# Altium PCB Steezy60ALPS.PcbDoc (part 3 of 3)
Units mm, origin at the board's own origin, x right, y up, seen from the top; angles counter-clockwise.
Board outline 284.73 x 94.2 mm, 2 copper layers (Component Side, Bottom Layer), stack 1.571 mm thick; 204 components, 132 nets, 895 pads, 223 vias.
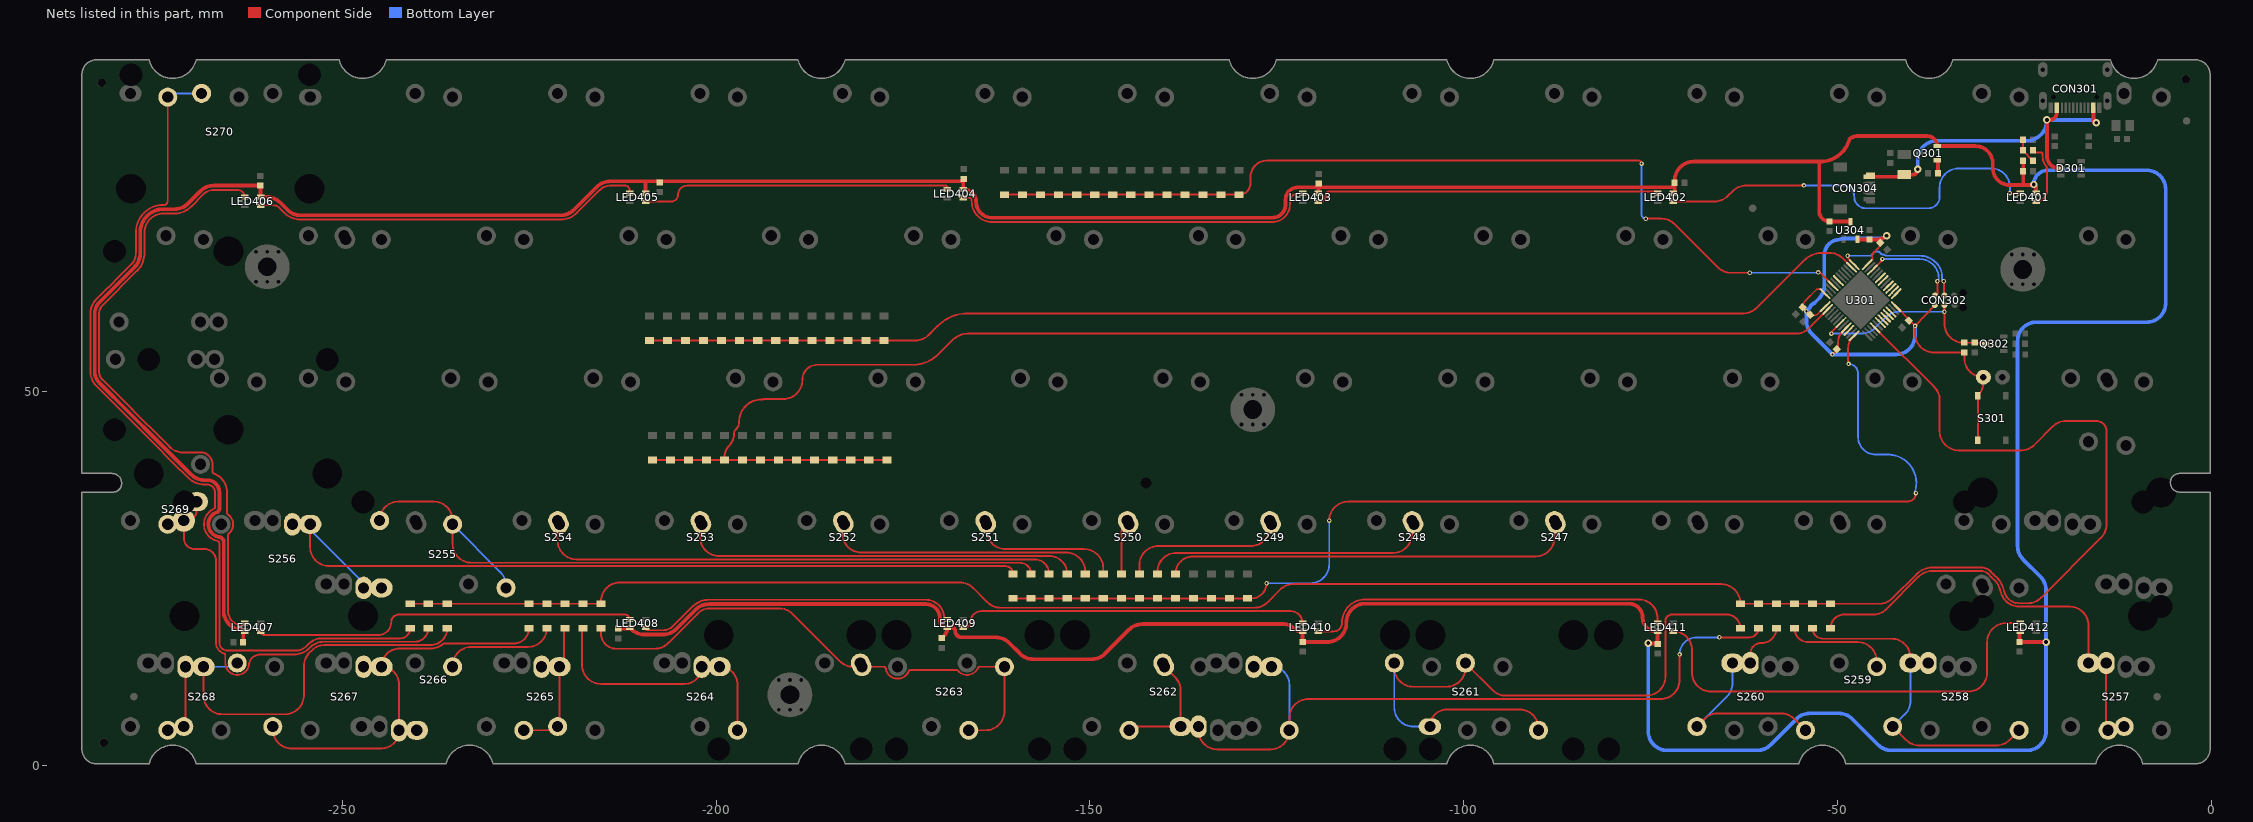
[diagram p3: the nets of this part, all layers, seen from the top]

## Via types
v1: diameter 0.6, hole 0.3, Component Side to Bottom Layer, tented both sides, 156 vias
v2: diameter 1, hole 0.5, Component Side to Bottom Layer, tented both sides, 42 vias
v3: diameter 0.6, hole 0.3, Component Side to Bottom Layer, tented bottom, 25 vias

## Nets (pads, with @x,y where several pads share a name; then routed paths per layer and width w, separated by ;. In a path a pad name is that pad's centre, name@x,y a point inside that pad or via, vN(x,y) a via of type N, cw(c..) or ccw(c..) an arc to the next point about the centre after c; other vN are vias at no path point) (continued)
NetD247_1: D247.1 S247.1 | length 55.7
  Component Side w0.254: D247.1@-138.557,25.635 cw(c-136.214,25.635) -136.214,27.978 -90.39,27.978 ccw(c-90.39,30.518) -87.85,30.518 S247.1@-87.85,32.765
NetD248_1: D248.1 S248.1 | length 39
  Component Side w0.254: D248.1@-140.97,25.635 -140.97,25.908 cw(c-138.43,25.908) -138.43,28.448 -132.207,28.448 -109.44,28.448 ccw(c-109.44,30.988) -106.9,30.988 S248.1@-106.9,32.765
NetD249_1: D249.1 S249.1 | length 22.1
  Component Side w0.254: D249.1@-143.383,25.635 -143.383,26.816 cw(c-140.843,26.816) -140.843,29.356 -128.49,29.356 ccw(c-128.49,31.896) -125.95,31.896 S249.1@-125.95,32.512
NetD250_1: D250.1 S250.1 | length 7.4
  Component Side w0.254: D250.1@-145.796,25.635 -145.796,30.917 cw(c-143.256,30.917) -145.052,32.713 S250.1@-145,32.765
NetD251_1: D251.1 S251.1 | length 20.1
  Component Side w0.254: S251.1@-163.812,32.265 -163.812,31.48 ccw(c-161.272,31.48) -161.272,28.94 -150.749,28.94 cw(c-150.749,26.4) -148.209,26.4 D251.1@-148.209,25.635
NetD252_1: D252.1 S252.1 | length 37.4
  Component Side w0.254: S252.1@-183.099,32.765 -183.099,31.026 ccw(c-180.559,31.026) -180.559,28.486 -153.162,28.486 cw(c-153.162,25.946) -150.622,25.946 D252.1@-150.622,25.635
NetD253_1: D253.1 S253.1 | length 54.1
  Component Side w0.254: S253.1@-202.15,32.765 -202.15,30.572 ccw(c-199.61,30.572) -199.61,28.032 -155.432,28.032 cw(c-155.432,25.635) D253.1@-153.035,25.635
NetD254_1: D254.1 S254.1 | length 71
  Component Side w0.254: S254.1@-221.2,32.765 -221.2,30.118 ccw(c-218.66,30.118) -218.66,27.578 -157.391,27.578 cw(c-157.391,25.635) D254.1@-155.448,25.635
NetD255_1: D255.1 S255.1 | length 107.1
  Component Side w0.254: S255.1@-245.012,32.512 S255.1@-245.012,32.765 ; S255.1@-245.012,32.765 cw(c-242.472,32.766) -242.472,35.306 -237.79,35.306 cw(c-237.79,32.766) -235.25,32.766 S255.1@-235.25,32.265 -235.25,29.664 ccw(c-232.71,29.664) -232.71,27.124 -159.35,27.124 cw(c-159.35,25.635) D255.1@-157.861,25.635
  Bottom Layer w0.254: S255.1@-235.25,32.265 -228.85,25.865 cw(c-230.646,24.069) -228.106,24.069 S255.1@-228.106,23.765
NetD256_1: D256.1 S256.1 | length 110.6
  Component Side w0.254: S256.1@-254.299,32.265 -254.299,29.21 ccw(c-251.759,29.21) -251.759,26.67 -161.309,26.67 cw(c-161.309,25.635) D256.1@-160.274,25.635
  Bottom Layer w0.254: S256.1@-254.199,32.265 -254.199,31.441 -247.055,24.297 S256.1@-247.055,23.765
NetD257_1: D257.1 S257.1 | length 57.8
  Component Side w0.254: D257.1@-50.927,18.365 cw(c-49.096,18.365) -49.096,20.196 -45.177,20.196 ccw(c-45.177,22.571) -43.499,20.89 ccw(c-45.177,22.571) -43.496,20.893 -39.098,25.291 cw(c-37.302,23.495) -37.302,26.035 -30.79,26.035 cw(c-30.79,24.638) -29.802,25.626 -29.393,25.217 -28.899,24.723 cw(c-29.078,24.543) -28.889,24.712 -28.85,24.669 cw(c-30.719,22.987) -28.428,24.024 cw(c-30.719,22.987) -28.322,23.746 -28.087,23.007 ccw(c-25.7,23.765) -27.985,22.739 ccw(c-25.7,23.765) -25.7,21.26 -18.952,21.26 cw(c-18.952,18.72) -16.412,18.72 S257.1@-16.412,13.715 ; S257.1@-17.062,13.715 S257.1@-16.738,14.04 ; S257.1@-14.681,13.715 -14.097,13.131 -14.097,5.018 S257.1@-13.794,4.715 ; S257.1@-11.557,4.208 S257.1@-11.557,5.588
NetD258_1: D258.1 S258.1 | length 44
  Component Side w0.254: D258.1@-53.34,18.365 ccw(c-51.939,18.365) -51.939,16.964 -42.764,16.964 cw(c-42.764,14.424) -40.224,14.424 S258.1@-40.224,13.715 ; S258.1@-42.606,5.215 -40.802,3.411 ccw(c-39.006,5.207) -39.006,2.667 -28.8,2.667 ccw(c-28.8,5.207) -27.004,3.411 S258.1@-25.699,4.715
  Bottom Layer w0.254: S258.1@-42.606,5.215 -40.968,6.852 ccw(c-42.764,8.648) -40.224,8.648 S258.1@-40.224,13.715
NetD259_1: D259.1 S259.1 | length 14.3
  Component Side w0.254: D259.1@-55.753,18.365 ccw(c-53.898,18.365) -53.898,16.51 -47.29,16.51 cw(c-47.29,13.97) -44.75,13.97 S259.1@-44.75,13.215
NetD260_1: D260.1 S260.1 | length 33
  Component Side w0.254: S260.1@-68.799,5.215 -67.773,6.241 cw(c-65.977,4.445) -65.977,6.985 -57.597,6.985 cw(c-57.597,4.445) -56.935,6.897 cw(c-57.597,4.445) -55.801,6.241 S260.1@-54.274,4.715 ; S260.1@-61.656,13.715 -61.656,14.925 cw(c-60.198,14.925) -60.198,16.383 -60.148,16.383 ccw(c-60.148,18.365) D260.1@-58.166,18.365
  Bottom Layer w0.254: S260.1@-68.799,5.215 -64.781,9.234 ccw(c-66.577,11.03) -64.037,11.03 S260.1@-64.037,13.715
NetD261_1: D261.1 S261.1 | length 92.3
  Component Side w0.254: S261.1@-109.281,13.715 -109.281,13.081 ccw(c-106.741,13.081) -106.741,10.541 -102.296,10.541 ccw(c-102.296,13.081) -99.756,13.081 S261.1@-99.756,13.715 -96.129,10.088 ccw(c-94.333,11.884) -94.333,9.344 -75.565,9.344 ccw(c-75.565,11.884) -73.668,10.195 ccw(c-75.565,11.884) -73.025,11.884 -73.025,19.304 cw(c-72.136,19.304) -72.136,20.193 -64.82,20.193 cw(c-64.82,18.365) D261.1@-62.992,18.365 ; S261.1@-104.518,5.215 cw(c-102.24,5.215) -102.24,7.493 -92.533,7.493 cw(c-92.533,4.953) -89.993,4.953 S261.1@-89.993,4.715
  Bottom Layer w0.254: S261.1@-109.281,13.715 -109.281,7.755 ccw(c-106.741,7.755) -106.741,5.215 S261.1@-104.518,5.215
NetD262_1: D262.1 S262.1 | length 114
  Component Side w0.254: S262.1@-144.747,4.715 -144.247,5.215 S262.1@-137.856,5.215 -137.856,10.019 ccw(c-140.396,10.019) -138.6,11.815 S262.1@-139.999,13.215 ; S262.1@-135.474,5.215 -135.474,4.699 ccw(c-132.934,4.699) -132.934,2.159 -125.863,2.159 ccw(c-125.863,4.699) -123.323,4.699 S262.1@-123.323,4.715 -123.323,6.35 cw(c-120.783,6.35) -120.783,8.89 -73.66,8.89 ccw(c-73.66,11.43) -71.12,11.43 v1@-71.12,14.859 ; v1(-65.786,17.145) -61.799,17.145 ccw(c-61.799,18.365) D262.1@-60.579,18.365
  Bottom Layer w0.254: S262.1@-125.705,13.215 cw(c-125.705,10.834) -123.323,10.834 S262.1@-123.323,4.715 ; v1(-71.116,14.859) cw(c-68.83,14.859) -68.83,17.145 v1(-65.786,17.145)
NetD263_1: D263.1 S263.1 | length 75.8
  Component Side w0.254: D263.1@-215.646,18.588 D263.1@-215.392,18.588 ; D263.1@-215.392,18.365 -215.392,17.653 ccw(c-213.36,17.653) -213.36,15.621 -208.212,15.621 ccw(c-208.212,18.161) -206.416,16.365 -202.353,20.428 cw(c-200.914,18.985) -200.914,21.023 -191.582,21.023 cw(c-191.582,18.483) -189.786,20.279 -183.466,13.959 ccw(c-181.67,15.755) -181.67,13.215 S263.1@-180.481,13.215 ; S263.1@-180.718,13.715 -180.718,13.459 -180.474,13.215 -177.553,13.215 cw(c-177.552,12.961) -177.3,12.996 ccw(c-175.718,13.215) -174.243,12.604 cw(c-174.008,12.507) -174.008,12.761 -167.833,12.761 cw(c-167.833,12.507) -167.641,12.673 ccw(c-166.431,13.715) -164.972,13.064 cw(c-164.74,12.961) -164.739,13.215 S263.1@-161.431,13.215 -161.431,7.255 cw(c-163.971,7.255) -163.971,4.715 S263.1@-166.193,4.715
NetD264_1: D264.1 S264.1 | length 33.8
  Component Side w0.254: D264.1@-217.932,18.588 -217.932,13.462 ccw(c-215.392,13.462) -215.392,10.922 -204.205,10.922 ccw(c-204.205,13.215) S264.1@-201.912,13.215 ; S264.1@-199.531,13.215 cw(c-199.531,10.834) -197.15,10.834 S264.1@-197.15,4.715
NetD265_1: D265.1 S265.1 | length 18.8
  Component Side w0.254: S265.1@-225.724,4.715 -221.7,4.715 S265.1@-221.199,5.215 -220.962,5.453 S265.1@-220.962,13.215 -220.345,13.832 D265.1@-220.345,18.588
  Bottom Layer w0.254: S265.1@-221.199,5.215 S265.1@-220.962,5.453
NetD266_1: D266.1 S266.1 | length 16.2
  Component Side w0.254: S266.1@-235.25,13.215 -235.25,13.335 cw(c-232.71,13.335) -232.71,15.875 -225.171,15.875 ccw(c-225.171,18.415) D266.1@-222.631,18.415 ; D266.1@-222.631,18.034 D266.1@-222.631,18.415 ; D266.1@-222.631,18.588 D266.1@-222.631,18.415
NetD267_1: D267.1 S267.1 | length 52.6
  Component Side w0.254: S267.1@-259.299,5.215 -259.299,4.826 ccw(c-256.759,4.826) -256.759,2.286 -244.856,2.286 ccw(c-244.856,4.826) -244.282,2.352 ccw(c-244.856,4.826) -242.382,4.252 ccw(c-244.856,4.826) S267.1@-242.316,4.826 ; S267.1@-242.418,4.715 -242.418,10.859 ccw(c-244.774,10.859) S267.1@-244.774,13.215 cw(c-242.333,13.215) -242.333,15.656 -238.221,15.656 ccw(c-238.221,18.365) -236.502,16.271 cw(c-236.341,16.075) -236.34,16.329 -227.08,16.329 ccw(c-227.08,18.365) D267.1@-225.044,18.365
NetD268_1: D268.1 S268.1 | length 61.6
  Component Side w0.254: S268.1@-273.349,4.715 -272.653,4.715 -270.968,6.4 S268.1@-270.968,13.215 ; S268.1@-268.587,13.215 -268.587,9.398 ccw(c-266.047,9.398) -266.047,6.858 -257.683,6.858 ccw(c-257.683,9.398) -257.553,6.861 ccw(c-257.683,9.398) -255.146,9.268 ccw(c-257.683,9.398) -255.143,9.398 -255.143,13.285 cw(c-252.603,13.285) -254.399,15.081 -254.056,15.423 ; S268.1@-264.562,13.215 S268.1@-264.062,13.715 S268.1@-264.062,13.491 ; -254.056,15.424 cw(c-252.399,13.766) -252.399,16.11 -238.221,16.11 ccw(c-238.221,18.365) D268.1@-235.966,18.365
  Bottom Layer w0.254: S268.1@-268.587,13.215 -264.562,13.215 S268.1@-264.062,13.715
NetD269_1: D269.1 S269.1 | length 57.3
  Component Side w0.254: S269.1@-269.469,35.29 -269.469,34.187 cw(c-270.891,34.187) -270.891,32.765 S269.1@-271.206,32.765 -271.206,30.414 ccw(c-269.748,30.414) -269.748,28.956 -268.435,28.956 cw(c-268.435,27.432) -266.911,27.432 -266.911,16.462 ccw(c-265.368,16.462) -266.534,15.452 ccw(c-265.368,16.462) -265.836,14.992 cw(c-265.913,14.75) -265.659,14.748 -265.659,13.716 ccw(c-264.062,13.715) -264.165,12.121 ccw(c-264.062,13.715) -262.519,13.304 ccw(c-264.062,13.715) -262.465,13.678 cw(c-262.211,13.673) -262.465,13.68 cw(c-262.211,13.673) -262.455,13.745 cw(c-260.964,13.304) -260.964,14.859 -256.425,14.859 ccw(c-256.425,17.665) -254.51,15.614 ; -254.509,15.613 -254.242,15.88 ; -254.238,15.875 cw(c-252.399,13.766) -252.399,16.564 -240.307,16.564 ccw(c-240.307,18.365) D269.1@-238.506,18.365
NetD270_1: D270.1 S270.1 | length 119.1
  Component Side w0.254: S270.1@-273.35,89.415 -273.35,75.586 cw(c-274.011,75.586) -273.621,75.053 cw(c-273.77,75.258) -273.77,75.004 -273.92,75.004 ccw(c-273.92,71.31) -274.68,74.925 ccw(c-273.92,71.31) -276.818,73.6 ccw(c-273.92,71.31) -277.614,71.31 -277.614,68.616 cw(c-279.908,68.616) -277.748,67.844 ccw(c-276.422,67.369) -277.789,67.709 cw(c-278.707,67.941) -278.036,67.272 ccw(c-277.221,66.455) -278.122,67.177 cw(c-279.908,68.616) -278.286,66.994 -279.637,65.642 -281.34,63.94 cw(c-281.52,64.119) -281.432,63.881 -281.432,63.848 -282.495,62.785 -282.893,62.387 ccw(c-280.924,60.416) -283.485,61.513 ccw(c-280.924,60.416) -283.614,61.141 ccw(c-282.5,60.841) -283.629,61.08 ccw(c-280.019,60.309) -283.642,61.017 cw(c-283.891,61.066) -283.658,60.964 ccw(c-283.083,60.714) -283.71,60.714 -283.71,52.741 ccw(c-280.924,52.741) -283.71,52.702 ccw(c-280.924,52.741) -283.268,51.235 ccw(c-280.924,52.741) -282.897,50.774 -281.987,49.864 -280.336,48.213 -278.558,46.435 -276.653,44.53 -275.383,43.26 -272.589,40.466 -270.635,38.512 ccw(c-268.431,40.716) -270.316,38.234 ccw(c-268.431,40.716) -268.431,37.599 -268.068,37.599 cw(c-268.067,37.345) -268.056,37.599 cw(c-268.097,36.522) -267.355,37.304 cw(c-268.097,36.522) -267.019,36.522 -267.019,34.583 cw(c-267.273,34.582) -267.167,34.352 ccw(c-266.206,32.265) -267.76,33.957 ccw(c-266.206,32.265) -266.661,30.013 cw(c-266.711,29.764) -266.457,29.763 -266.457,16.462 ccw(c-265.368,16.462) -265.368,15.373 -265.108,15.373 -255.927,15.373 ccw(c-255.927,15.627) -255.868,15.38 ccw(c-256.425,17.665) -254.884,15.888 ; -254.762,16.002 -254.49,16.274 cw(c-252.694,14.478) -252.694,17.018 -248.346,17.018 -244.475,17.018 -242.266,17.018 ccw(c-242.266,18.365) D270.1@-240.919,18.365
  Bottom Layer w0.254: S270.1@-273.35,89.415 -272.85,89.915 S270.1@-268.825,89.915
NetLED401_2: LED401.2 LED402.4 | length 54.6
  Component Side w0.254: LED402.4@-71.935,75.45 -66.445,75.45 ccw(c-66.445,77.99) -64.649,76.194 -63.99,76.853 cw(c-62.194,75.057) -62.194,77.597 v1(-54.483,77.597) ; v1(-26.924,76.581) ccw(c-26.893,76.581) -26.893,76.55 LED401.2@-25.565,76.55
  Bottom Layer w0.254: v1(-54.483,77.597) -49.276,77.597 cw(c-49.276,76.073) -47.752,76.073 ccw(c-46.228,76.073) -46.228,74.549 -37.846,74.549 ccw(c-37.846,76.073) -36.322,76.073 -36.322,77.343 cw(c-33.782,77.343) -33.782,79.883 -29.464,79.883 cw(c-29.464,77.343) -26.924,77.343 v1(-26.924,76.581)
NetLED401_4: LED401.4 R401.2 | length 8.9
  Component Side w0.254: R401.2@-23.861,82.296 -23.588,82.019 -22.802,82.019 cw(c-22.802,81.765) -22.548,81.765 -22.548,81.534 ccw(c-20.32,81.534) -22.522,81.195 ccw(c-20.32,81.534) -22.131,80.236 cw(c-22.338,80.089) -22.127,80.231 -22.081,80.162 ccw(c-21.87,80.303) -22.05,80.125 -22.045,80.119 cw(c-22.225,79.94) -21.971,79.94 -21.971,76.914 cw(c-23.435,76.914) LED401.4@-23.435,75.45
NetLED402_2: LED402.2 LED403.4 | length 46.3
  Component Side w0.254: LED403.4@-119.421,75.45 -119.114,75.45 ccw(c-119.114,76.073) -118.491,76.073 cw(c-117.729,76.073) -118.452,76.314 cw(c-117.993,76.314) -117.993,76.773 -74.288,76.773 cw(c-74.288,76.55) LED402.2@-74.065,76.55
NetLED403_2: LED403.2 LED404.4 | length 49.7
  Component Side w0.254: LED404.4@-166.935,75.95 -166.935,75.946 -166.099,75.946 cw(c-166.1,75.692) -165.861,75.776 cw(c-166.839,75.438) -165.804,75.438 ccw(c-163.068,75.438) -163.068,72.702 -125.603,72.702 ccw(c-125.603,75.057) -123.248,75.057 -123.248,75.444 cw(c-122.142,75.444) -123.241,75.571 cw(c-122.142,75.444) -122.142,76.55 LED403.2@-121.551,76.55
NetLED404_2: LED404.2 LED405.4 | length 42
  Component Side w0.254: LED405.4@-209.435,75.45 -205.982,75.45 ccw(c-205.982,76.327) -205.105,76.327 cw(c-203.859,76.327) -203.859,77.573 -169.314,77.573 cw(c-169.314,77.319) LED404.2@-169.065,77.372 ; LED404.2@-169.065,77.05 LED404.2@-169.065,77.371
NetLED405_2: LED405.2 LED406.4 | length 52.8
  Component Side w0.254: LED406.4@-260.935,74.95 -259.242,74.95 cw(c-259.242,73.819) -258.442,74.619 -258.166,74.343 ccw(c-256.371,76.14) -258.162,74.339 -257.762,73.939 ccw(c-255.555,76.14) -255.555,73.023 -220.822,73.023 ccw(c-220.822,76.14) -218.617,73.937 -215.746,76.808 -215.557,76.997 ; -215.3,77.213 ccw(c-214.168,75.61) -215.557,76.997 ; LED405.2@-211.565,76.55 -211.565,76.945 ccw(c-212.217,76.945) -211.995,77.558 ccw(c-212.081,77.319) -212.08,77.573 -214.168,77.573 ccw(c-214.168,75.61) -215.557,76.997
NetLED406_2: LED406.2 LED407.4 | length 85.1
  Component Side w0.254: -266.864,38.908 cw(c-268.097,36.522) -266.292,38.511 cw(c-268.097,36.522) -265.411,36.522 -265.411,36.336 -265.411,33.79 ccw(c-265.157,33.79) -265.301,33.581 cw(c-266.206,32.265) -265.209,33.512 ; -266.816,38.883 ccw(c-268.097,36.522) -267.189,39.05 cw(c-267.103,39.289) -267.332,39.179 cw(c-266.827,39.422) -267.387,39.422 -267.387,40.068 ccw(c-268.969,40.29) -268.236,41.709 cw(c-268.121,41.936) -268.26,41.723 ccw(c-268.767,40.951) -268.767,41.874 ccw(c-268.969,40.29) -269.157,41.876 cw(c-269.187,42.128) -269.187,41.874 -270.723,41.874 -271.313,41.874 cw(c-271.313,44.414) -271.316,41.874 cw(c-271.313,44.414) -273.109,42.618 -274.44,43.949 -277.488,46.997 -277.742,47.251 -278.201,47.71 -282.08,51.589 cw(c-280.924,52.741) -282.556,52.741 -282.556,60.309 cw(c-280.019,60.309) -282.5,60.841 cw(c-280.924,60.416) -282.078,61.57 -277.47,66.178 ccw(c-279.908,68.616) -277.221,66.455 ccw(c-278.707,67.941) -276.669,67.43 cw(c-276.422,67.369) -276.662,67.454 ccw(c-279.908,68.616) -276.46,68.616 -276.46,71.31 cw(c-273.92,71.31) -273.92,73.85 -272.225,73.85 ccw(c-272.225,74.422) -272.076,73.87 cw(c-272.011,73.624) -272.044,73.876 ccw(c-272.446,76.967) -270.241,74.764 -268.576,76.429 cw(c-267.187,75.042) -267.187,77.005 -264.02,77.005 cw(c-264.02,76.05) LED406.2@-263.065,76.05 ; -264.943,31.287 ccw(c-266.206,32.265) -265.209,33.512 ; LED407.4@-263.065,19.05 -263.383,18.827 -263.383,18.773 cw(c-263.498,18.999) -263.52,18.746 cw(c-263.34,20.701) -263.731,18.777 cw(c-263.34,20.701) -265.303,20.701 -265.303,29.337 -265.303,30.82 cw(c-265.049,30.82) -265.208,31.019 ccw(c-266.206,32.265) -265.208,33.511 cw(c-265.049,33.71) -265.209,33.512
NetLED407_2: LED407.2 LED408.4 | length 51.6
  Component Side w0.254: LED407.2@-260.935,17.95 ccw(c-260.457,17.95) -260.457,17.472 -245.164,17.472 ccw(c-245.164,19.177) -243.459,19.177 cw(c-242.443,19.177) -242.443,20.193 -212.208,20.193 cw(c-212.208,19.55) LED408.4@-211.565,19.55
NetLED408_2: LED408.2 LED409.4 | length 43.6
  Component Side w0.254: LED408.2@-209.435,18.45 -209.354,18.227 -209.354,18.171 ccw(c-209.181,18.357) -209.181,18.103 -207.123,18.103 ccw(c-207.123,20.066) -205.734,18.679 -203.266,21.147 -203.171,21.242 cw(c-200.914,18.985) -200.914,22.177 -171.968,22.177 cw(c-171.968,19.685) -169.478,19.792 ccw(c-169.225,19.804) -169.475,19.76 -169.438,19.76 LED409.4@-169.065,19.55 LED409.4@-169.065,19.637
NetLED409_2: LED409.2 LED410.4 | length 47.6
  Component Side w0.254: LED409.2@-166.935,18.45 -166.716,18.45 ccw(c-166.716,19.177) -165.989,19.177 cw(c-164.516,19.177) -164.516,20.65 -123.151,20.65 cw(c-123.151,19.05) LED410.4@-121.551,19.05
NetLED410_2: LED410.2 LED411.4 | length 49.9
  Component Side w0.254: LED410.2@-119.421,17.95 -117.389,17.95 ccw(c-117.389,19.065) -116.274,19.065 -116.274,19.112 cw(c-113.157,19.112) -113.157,22.229 -76.605,22.229 cw(c-76.605,19.689) -74.065,19.689 LED411.4@-74.065,19.05
NetLED411_2: LED411.2 LED412.4 | length 59.2
  Component Side w0.254: LED411.2@-71.935,17.95 cw(c-71.935,15.484) -69.469,15.484 -69.469,12.449 ccw(c-66.929,12.449) -66.929,9.909 -64.9,9.909 ccw(c-64.77,12.446) -64.77,9.906 -32.512,9.906 ccw(c-32.512,12.446) -29.972,12.446 -29.972,16.51 cw(c-27.432,16.51) -27.432,19.05 LED412.4@-25.565,19.05
NetQ301_1: Q301.1 R307.1 | length 1.8
  Component Side w0.5: Q301.1@-36.646,80.965 cw(c-36.646,80.88) -36.561,80.88 R307.1@-36.561,79.248
NetR306_2: R306.2 R308.1 R401.1 | length 3.3
  Component Side w0.254: R308.1@-25.161,83.693 R401.1@-25.161,82.296 -24.888,81.998 -24.134,81.197 R306.2@-23.861,80.899
NRST: C310.1 CON302.3 Q302.3 R303.2 U301.7 | length 27.4
  Component Side w0.254: v1(-50.8,57.785) cw(c-50.311,57.785) -50.657,58.13 U301.7@-49.701,59.087 ; CON302.3@-35.687,61.595 v1(-35.687,60.706) -35.687,59.098 ccw(c-33.147,59.098) -33.147,56.558 R303.2@-33.024,56.558 -30.302,56.558 cw(c-30.302,56.416) Q302.3@-30.16,56.416
  Bottom Layer w0.254: v1(-50.8,57.785) -46.772,57.785 ccw(c-46.772,60.325) -44.976,58.529 -43.543,59.962 cw(c-41.747,58.166) -41.747,60.706 v1(-35.687,60.706)
PA0: U301.10
PA2: D243.2 D244.2 D245.2 D246.2 D247.2 D248.2 D249.2 D250.2 D251.2 D252.2 D253.2 D254.2 D255.2 D256.2 U301.12 | length 158.9
  Component Side w0.254: D256.2@-160.274,22.365 D255.2@-157.861,22.365 D254.2@-155.448,22.365 D253.2@-153.035,22.365 D252.2@-150.622,22.365 D251.2@-148.209,22.365 D250.2@-145.796,22.365 D249.2@-143.383,22.365 D248.2@-140.97,22.365 D247.2@-138.557,22.365 D246.2@-136.144,22.365 D245.2@-133.731,22.365 D244.2@-131.318,22.365 D243.2@-128.905,22.365 -128.384,22.365 ccw(c-128.384,24.384) v1@-126.365,24.384 ; v1@-117.983,32.766 cw(c-115.443,32.766) -115.443,35.306 -40.636,35.306 ccw(c-40.636,36.449) v1(-39.493,36.449) ; v1(-48.514,53.721) cw(c-48.514,53.775) -48.568,53.775 -48.568,55.786 cw(c-46.4,55.786) -47.934,57.318 U301.12@-48.374,56.878
  Bottom Layer w0.254: v1(-126.361,24.384) -120.523,24.384 ccw(c-120.523,26.924) -117.983,26.924 v1@-117.983,32.766 ; v1(-48.514,53.721) cw(c-48.514,52.451) -47.244,52.451 -47.244,44.204 ccw(c-45.085,44.204) -47.228,43.944 ccw(c-44.875,43.944) -44.875,41.591 -43.087,41.591 cw(c-43.088,39.975) -42.791,41.564 ccw(c-42.746,41.814) -42.779,41.562 cw(c-43.25,37.79) -42.608,41.536 -42.605,41.536 cw(c-43.25,37.79) -39.584,38.793 cw(c-43.25,37.79) -39.599,36.732 ccw(c-39.355,36.662) v1(-39.493,36.449)
  other v1: -117.979,32.766
PA6: D257.2 D258.2 D259.2 D260.2 D261.2 D262.2 D263.2 D264.2 D265.2 D266.2 D267.2 D268.2 D269.2 D270.2 U301.16 | length 296.9
  Component Side w0.254: D270.2@-240.919,21.635 D269.2@-238.506,21.635 D268.2@-235.966,21.635 D267.2@-225.044,21.635 D266.2@-222.631,21.635 D265.2@-220.218,21.635 D264.2@-217.805,21.635 D263.2@-215.392,21.635 -215.392,21.952 cw(c-212.852,21.952) -212.852,24.492 -167.403,24.492 cw(c-167.403,21.952) -165.607,23.748 -163.707,21.848 ccw(c-161.911,23.644) -161.911,21.104 -128.03,21.104 ccw(c-128.03,23.644) -126.234,21.848 -124.569,23.513 cw(c-122.773,21.717) -122.773,24.257 -65.532,24.257 cw(c-65.532,21.717) -62.992,21.717 D261.2@-62.992,21.635 D262.2@-60.579,21.635 D260.2@-58.166,21.635 D259.2@-55.753,21.635 D258.2@-53.34,21.635 D257.2@-50.927,21.635 -44.448,21.635 ccw(c-44.448,24.175) -42.652,22.379 -39.42,25.611 cw(c-37.302,23.495) -39.418,25.613 cw(c-37.302,23.495) -37.302,26.489 -30.79,26.489 cw(c-30.79,24.638) -29.755,26.173 cw(c-30.79,24.638) -29.754,26.172 cw(c-30.79,24.638) -29.48,25.946 -29.078,25.544 -28.564,25.03 -28.513,24.973 cw(c-30.719,22.987) -27.889,23.883 -27.752,23.453 -27.655,23.144 ccw(c-25.7,23.765) -25.7,21.714 -24.543,21.714 ccw(c-24.543,24.254) -22.747,22.458 -14.762,30.443 ccw(c-16.558,32.239) -14.018,32.239 -14.018,44.752 ccw(c-15.367,44.752) -15.367,46.101 -19.395,46.101 ccw(c-19.395,43.561) -21.191,45.357 -23.64,42.908 cw(c-25.436,44.704) -25.436,42.164 -33.782,42.164 cw(c-33.782,44.704) -36.322,44.704 -36.322,48.863 ccw(c-38.862,48.863) -37.066,50.659 U301.16@-44.786,58.38
PA9: U301.30
PA10: U301.31
PA15: D215.2 D216.2 D217.2 D218.2 D219.2 D220.2 D221.2 D222.2 D223.2 D224.2 D225.2 D226.2 D227.2 D228.2 U301.38 | length 165.5
  Component Side w0.254: D228.2@-208.915,56.865 D227.2@-206.502,56.865 D226.2@-204.089,56.865 D225.2@-201.676,56.865 D224.2@-199.263,56.865 D223.2@-196.85,56.865 D222.2@-194.437,56.865 D221.2@-192.024,56.865 D220.2@-189.611,56.865 D219.2@-187.198,56.865 D218.2@-184.785,56.865 D217.2@-182.372,56.865 D216.2@-179.959,56.865 D215.2@-177.546,56.865 -173.334,56.865 ccw(c-173.334,59.405) -171.54,57.607 ccw(c-173.334,59.405) -171.538,57.609 -171.268,57.879 -170.328,58.819 cw(c-166.285,54.775) -166.285,60.493 -62.592,60.493 ccw(c-62.592,63.033) -60.796,61.237 -57.397,64.636 -56.952,65.08 -56.19,65.842 -55.618,66.415 ; -55.618,66.415 -54.465,67.568 cw(c-52.025,65.132) -52.189,68.576 ccw(c-52.201,68.83) -52.186,68.576 cw(c-52.07,66.791) -52.07,68.58 -51.089,68.58 cw(c-51.089,66.04) -49.293,67.836 U301.38@-48.287,66.83
PB0: U301.18
PB1: U301.19
PB2: U301.20
PB7: U301.43
PB8: D201.2 D202.2 D203.2 D204.2 D205.2 D206.2 D207.2 D208.2 D209.2 D210.2 D211.2 D212.2 D213.2 D214.2 U301.45 | length 124.4
  Component Side w0.254: D214.2@-161.417,76.365 D213.2@-159.004,76.365 D212.2@-156.591,76.365 D211.2@-154.178,76.365 D210.2@-151.765,76.365 D209.2@-149.352,76.365 D208.2@-146.939,76.365 D207.2@-144.526,76.365 D206.2@-142.113,76.365 D205.2@-139.7,76.365 D204.2@-137.287,76.365 D203.2@-134.874,76.365 D202.2@-132.461,76.365 D201.2@-130.048,76.365 ccw(c-130.048,77.889) -128.524,77.889 -128.524,78.486 cw(c-125.984,78.486) -128.511,78.739 cw(c-126.335,78.739) -127.026,80.802 cw(c-126.335,78.739) -126.335,80.915 -76.597,80.915 cw(c-76.597,80.518) v1@-76.2,80.518 ; v1@-75.656,73.152 v1(-75.652,73.152) -73.569,73.152 cw(c-73.569,70.612) -71.773,72.408 -66.022,66.657 ccw(c-64.226,68.453) -64.226,65.913 v1@-61.722,65.913 ; v1(-52.583,65.968) -52.517,65.901 -52.308,65.901 U301.45@-50.761,64.355
  Bottom Layer w0.254: v1(-76.196,80.518) -76.196,73.696 ccw(c-75.652,73.696) v1(-75.652,73.152) ; v1(-61.718,65.913) -52.638,65.913 v1(-52.583,65.968)
PB10: U301.21
PB11: U301.22
PB12: U301.25
PB13: U301.26
PB14: U301.27
PB15: U301.28
PC13: D229.2 D230.2 D231.2 D232.2 D233.2 D234.2 D235.2 D236.2 D237.2 D238.2 D239.2 D240.2 D241.2 D242.2 U301.2 | length 189.4
  Component Side w0.254: D242.2@-208.534,40.865 D241.2@-206.121,40.865 D240.2@-203.708,40.865 D239.2@-201.295,40.865 D238.2@-198.882,40.865 ; -196.91,46.249 ccw(c-193.929,45.974) -196.923,45.974 -196.923,45.86 cw(c-197.177,45.859) -196.926,45.82 cw(c-198.439,46.039) -197.358,44.958 ccw(c-196.745,44.345) -197.612,44.345 -197.612,44.332 cw(c-199.78,44.332) -198.247,42.799 ccw(c-196.714,41.266) -198.882,41.266 D238.2@-198.882,40.865 ; -196.91,46.25 cw(c-193.929,45.974) -196.375,47.701 cw(c-193.929,45.974) -193.929,48.968 -193.832,48.968 ccw(c-193.832,49.222) -193.675,49.022 -191.008,49.022 ccw(c-191.008,51.562) -188.468,51.562 cw(c-186.42,51.562) -186.42,53.61 -173.379,53.61 ccw(c-173.379,53.864) -173.346,53.612 -173.05,53.651 ccw(c-173.677,58.42) -170.596,54.726 -170.476,54.827 ccw(c-171.349,55.872) -170.385,54.909 -170.186,55.108 -168.402,56.892 cw(c-166.285,54.775) -166.285,57.769 -55.606,57.769 ccw(c-55.606,60.309) -53.81,58.513 U301.2@-51.469,60.855 ; D229.2@-177.165,40.865 D230.2@-179.578,40.865 D231.2@-181.991,40.865 D232.2@-184.404,40.865 D233.2@-186.817,40.865 D234.2@-189.23,40.865 D235.2@-191.643,40.865 D236.2@-194.056,40.865 D237.2@-196.469,40.865 D238.2@-198.882,40.865
RAW: CON301.A4B9 CON301.B4A9 CON304.1 D301.5 F301.2 | length 49.3
  Component Side w0.5: CON304.1@-45.625,78.75 F301.2@-41.052,78.75 ; F301.2@-41.052,79.041 -39.958,79.041 ccw(c-39.958,79.756) v2(-39.243,79.756) ; v2@-22.098,86.36 -21.336,86.36 ; v2(-21.971,86.36) -21.971,81.534 ccw(c-20.32,81.534) -20.32,79.883 D301.5@-20.105,79.883 ; v2@-21.653,86.36 ccw(c-21.653,87.364) -20.65,87.364 CON301.B4A9@-20.65,88 ; -15.75,86.743 CON301.A4B9@-15.75,88 -15.75,86.362 ccw(c-15.367,86.362) v2(-15.367,85.979)
  Bottom Layer w0.5: v2(-39.243,79.756) -39.243,81.026 cw(c-36.703,81.026) -36.703,83.566 -24.765,83.566 ccw(c-24.765,86.36) v2(-21.971,86.36) -15.748,86.36 cw(c-15.748,85.979) v2(-15.367,85.979)
SWCLK: CON302.4 U301.37 | length 18.6
  Component Side w0.254: v1(-48.641,68.199) ccw(c-47.898,68.199) -48.423,67.673 U301.37@-47.933,67.183 ; v1(-35.768,64.77) -35.768,62.946 ccw(c-35.687,62.946) CON302.4@-35.687,62.865
  Bottom Layer w0.254: v1(-48.641,68.199) -45.563,68.199 ccw(c-45.564,68.453) -45.326,68.365 cw(c-44.737,68.149) -45.272,68.476 cw(c-44.737,68.149) -44.492,68.726 cw(c-44.737,68.149) -44.209,68.487 ccw(c-43.996,68.626) -43.994,68.372 cw(c-43.984,67.745) -43.61,68.248 ccw(c-43.46,68.453) -43.461,68.199 -43.307,68.199 cw(c-43.307,67.818) -43.299,68.199 ccw(c-43.295,68.453) -43.296,68.199 -38.989,68.199 cw(c-38.989,65.205) -36.893,67.343 cw(c-38.535,65.405) -36.892,67.342 cw(c-38.535,65.405) -36.598,67.048 cw(c-38.535,65.405) -35.995,65.405 -35.995,65.012 ccw(c-35.741,65.013) -35.814,64.77 v1(-35.768,64.77)
SWDIO: CON302.2 U301.34 | length 13.4
  Component Side w0.254: U301.34@-45.14,66.476 -44.065,67.551 ccw(c-44.259,67.745) v1(-43.984,67.745) ; CON302.2@-36.957,62.865 ccw(c-36.957,63.2) -36.622,63.2 v1(-36.622,64.77)
  Bottom Layer w0.254: v1(-43.984,67.745) -38.989,67.745 cw(c-38.989,65.205) -36.449,65.205 -36.449,64.943 cw(c-36.622,64.943) v1(-36.622,64.77)
VCC: C307.2 C401.2 C402.2 C403.2 C404.2 C405.2 C406.2 C407.2 C408.2 C409.2 C410.2 C411.2 C412.2 LED401.1 LED402.1 LED403.1 LED404.1 LED405.1 LED406.1 LED407.1 LED408.1 LED409.1 LED410.1 LED411.1 LED412.1 Q301.2 R306.1 U304.3 | length 707.7
  Component Side w0.5: C407.2@-263.256,16.51 -263.256,17.759 cw(c-263.065,17.759) LED407.1@-263.065,17.95 ccw(c-263.276,17.95) -263.276,18.161 -263.34,18.161 cw(c-263.34,20.701) -265.88,20.701 -265.88,29.969 ccw(c-266.38,29.969) -265.992,30.285 ccw(c-266.681,29.723) -266.251,30.501 ccw(c-266.494,30.064) -266.429,30.559 cw(c-266.206,32.265) -266.681,30.612 cw(c-266.206,32.265) -266.776,33.888 ccw(c-266.942,34.36) -266.442,34.361 -266.442,36.522 ccw(c-268.097,36.522) -267.781,38.147 ccw(c-268.097,36.522) -268.054,38.176 -268.431,38.176 cw(c-268.431,40.716) -269.895,38.641 cw(c-268.431,40.716) -269.975,38.7 cw(c-268.431,40.716) -270.202,38.896 cw(c-268.431,40.716) -270.227,38.92 -275.673,44.367 -277.769,46.462 -279.166,47.859 -281.748,50.441 -282.489,51.182 cw(c-280.924,52.741) -283.133,52.741 -283.133,60.309 cw(c-280.019,60.309) -283.064,60.96 cw(c-282.5,60.841) -283.057,60.99 cw(c-280.924,60.416) -282.825,61.541 cw(c-280.924,60.416) -282.485,61.979 -278.467,65.996 -277.877,66.587 ccw(c-279.908,68.616) -277.672,66.816 cw(c-277.221,66.455) -277.628,66.864 ccw(c-278.707,67.941) -277.229,67.568 cw(c-276.422,67.369) -277.205,67.647 ccw(c-279.908,68.616) -277.037,68.616 -277.037,71.31 cw(c-273.92,71.31) -276.239,73.393 cw(c-273.92,71.31) -275.607,73.931 cw(c-273.92,71.31) -273.92,74.427 -272.446,74.427 ccw(c-272.446,76.967) -270.65,75.171 -268.983,76.838 cw(c-267.187,75.042) -267.187,77.582 C406.2@-260.985,77.582 cw(c-261.106,77.461) -260.935,77.461 LED406.1@-260.935,76.05 -260.109,76.05 cw(c-260.109,73.51) -258.313,75.306 -257.351,74.344 ccw(c-255.555,76.14) -255.555,73.6 -220.822,73.6 ccw(c-220.822,76.14) -219.026,74.344 -215.964,77.406 cw(c-214.168,75.61) -214.168,78.15 -209.435,78.15 ; C408.2@-213.106,18.303 -211.92,18.303 ccw(c-211.92,18.805) LED408.1@-211.565,18.45 -211.385,18.27 ccw(c-209.589,20.066) -209.589,17.526 -207.123,17.526 ccw(c-207.123,20.066) -205.327,18.27 -202.858,20.74 -202.763,20.834 cw(c-200.914,18.985) -202.761,20.836 cw(c-200.914,18.985) -200.914,21.6 -171.968,21.6 cw(c-171.968,19.685) -170.053,19.685 -170.053,19.438 ccw(c-169.065,19.438) -170.021,19.189 cw(c-170.505,19.064) -170.01,19.136 ccw(c-169.565,19.2) -169.897,18.896 cw(c-170.264,18.556) -169.861,18.853 ccw(c-169.065,19.438) -169.317,18.483 -169.315,18.483 LED409.1@-169.065,18.45 ; LED405.1@-209.435,76.55 -209.435,78.15 ; C409.2@-169.799,17.033 -169.548,17.284 ccw(c-170.714,18.45) LED409.1@-169.065,18.45 ; LED403.1@-119.421,76.55 -119.421,77.35 ; v2(-75.311,16.383) -75.255,16.327 -74.097,16.327 C411.2@-74.041,16.271 cw(c-74.041,16.295) -74.065,16.295 LED411.1@-74.065,17.95 -74.211,17.95 cw(c-74.211,19.812) -76.073,19.812 ccw(c-77.913,19.812) -77.913,21.652 -113.157,21.652 ccw(c-113.157,19.112) -115.697,19.112 -115.697,19.065 cw(c-118.237,19.065) -118.237,16.525 C410.2@-121.539,16.525 cw(c-121.51,16.554) -121.551,16.554 LED410.1@-121.551,17.95 -121.686,17.95 cw(c-121.686,19.538) -122.809,18.415 ccw(c-124.035,17.189) -124.035,18.923 -142.966,18.923 ccw(c-142.966,16.383) -144.762,18.179 -147.973,14.968 cw(c-149.769,16.764) -149.769,14.224 -157.571,14.224 cw(c-157.571,16.764) -159.367,14.968 -160.8,16.401 ccw(c-162.596,14.605) -162.596,17.145 -167.132,17.145 cw(c-167.132,18.034) -168.021,18.034 ccw(c-168.437,18.034) -168.437,18.45 LED409.1@-169.065,18.45 ; LED402.1@-71.935,76.55 ccw(c-71.935,76.715) -71.77,76.715 -71.77,77.347 ; U304.3@-48.26,72.771 -48.26,72.786 C307.2@-51.054,72.786 cw(c-51.054,74.183) -52.451,74.183 -52.451,80.792 ; LED412.1@-25.565,17.95 ccw(c-25.565,17.861) -25.654,17.861 C412.2@-25.654,16.525 -22.098,16.525 v2(-22.098,16.51) ; R306.1@-25.161,80.899 -25.161,79.677 C401.2@-25.161,79.502 -25.161,77.876 cw(c-25.386,77.876) -25.386,77.65 ; LED401.1@-23.435,76.55 -23.435,77.41 ccw(c-23.749,77.41) v2(-23.749,77.724) cw(c-23.823,77.724) -23.823,77.65 -25.386,77.65 ; -209.435,78.15 -166.98,78.15 cw(c-166.98,78.105) -166.935,78.105 LED404.1@-166.935,77.05 -166.839,77.05 cw(c-166.839,75.438) -165.227,75.438 ccw(c-163.068,75.438) -163.068,73.279 -125.603,73.279 ccw(c-125.603,75.057) -123.825,75.057 -123.825,75.692 cw(c-122.167,75.692) -122.167,77.35 -119.421,77.35 ; -119.421,77.35 -71.773,77.35 -71.77,77.347 ; -71.77,77.347 C402.2@-71.77,77.978 -71.77,78.252 cw(c-69.23,78.252) -69.23,80.792 -52.451,80.792 ; -52.451,80.792 -52.29,80.792 ccw(c-52.29,84.817) -49.204,82.233 ccw(c-49.204,82.288) -49.149,82.288 cw(c-48.708,82.052) -49.105,82.356 ccw(c-52.29,84.817) -48.839,82.745 ccw(c-52.29,84.817) -48.436,83.655 cw(c-47.958,83.509) -48.261,83.907 cw(c-47.383,82.745) -47.383,84.201 -37.982,84.201 cw(c-37.982,82.865) Q301.2@-36.646,82.865 -31.557,82.865 cw(c-31.557,80.518) -29.21,80.518 -29.21,79.91 ccw(c-26.95,79.91) -26.95,77.65 -25.386,77.65
  Bottom Layer w0.5: v2(-75.311,16.383) -75.311,4.572 ccw(c-72.771,4.572) -72.771,2.032 -60.706,2.032 ccw(c-60.706,4.485) -58.972,2.75 -55.481,6.241 cw(c-53.685,4.445) -53.685,6.985 -49.82,6.985 cw(c-49.82,4.445) -48.024,6.241 -44.559,2.776 ccw(c-42.763,4.572) -42.763,2.032 -24.638,2.032 ccw(c-24.638,4.572) -23.114,2.54 ccw(c-24.638,4.572) -22.606,3.048 ccw(c-24.638,4.572) -22.098,4.572 v2(-22.098,16.51) -22.098,23.459 ccw(c-24.638,23.459) -22.842,25.255 -25.164,27.577 cw(c-23.368,29.373) -25.908,29.373 -25.908,56.769 cw(c-23.368,56.769) -23.368,59.309 -8.636,59.309 ccw(c-8.636,61.849) -6.096,61.849 -6.096,77.089 ccw(c-8.636,77.089) -8.636,79.629 -21.844,79.629 ccw(c-21.844,77.724) -22.118,79.609 ccw(c-21.844,77.724) -23.749,77.745 ccw(c-21.844,77.724) v2(-23.749,77.724)
VCC3V3: C301.2 C302.2 C303.2 C304.2 C305.2 C308.2 CON302.1 CON303.2 R303.1 S301.1 U301.1 U301.9 U301.24 U301.36 U301.48 U304.2 | length 87.9
  Component Side w0.203: U301.1@-51.822,61.208 -52.638,60.392 cw(c-52.959,60.713) -52.959,60.259 -53.625,60.259 C305.2@-53.642,60.277 -53.871,60.505 -54.43,61.064 C304.2@-54.658,61.293 cw(c-53.432,61.293) -54.299,62.16 -52.795,63.664 cw(c-52.578,63.447) -52.578,63.754 cw(c-52.578,63.04) -52.073,63.545 U301.48@-51.822,63.294
  Component Side w0.254: v1(-50.673,54.991) -50.249,55.415 C302.2@-50.086,55.674 ccw(c-50.51,56.098) -49.911,56.098 -49.911,56.642 cw(c-47.931,56.642) -49.331,58.042 U301.9@-48.994,58.38 ; U301.36@-45.847,67.183 -45.378,67.652 ccw(c-45.558,67.831) -45.321,67.922 cw(c-44.737,68.149) -45.106,68.656 -44.587,69.175 ccw(c-45.341,69.929) C303.2@-44.275,69.929 ; U301.24@-41.958,61.208 -40.434,59.684 C301.2@-40.434,59.515 -40.338,59.515 v1(-39.624,58.801) ; CON302.1@-36.957,61.595 v1(-39.624,58.801) ; S301.1@-31.212,43.482 S301.1@-31.212,49.482 ccw(c-32.979,51.249) -30.48,51.249 CON303.2@-30.48,51.943 -30.484,51.943 cw(c-30.484,54.483) -33.024,54.483 R303.1@-33.024,55.258 -37.084,55.258 cw(c-37.084,57.798) -39.624,57.798 v1(-39.624,58.801)
  Component Side w0.5: U304.2@-47.31,70.371 -44.629,70.371 ccw(c-44.629,72.061) v2(-43.434,70.866)
  Bottom Layer w0.5: v2(-43.434,70.866) cw(c-44.354,71.786) -44.354,70.485 -49.036,70.485 ccw(c-49.036,67.945) -49.858,70.348 ccw(c-49.657,68.258) -51.757,68.258 -51.757,65.899 ccw(c-51.012,65.812) -51.759,65.744 cw(c-52.257,65.7) -51.757,65.702 -51.757,64.23 cw(c-54.297,64.23) -52.501,62.434 -53.025,61.91 cw(c-53.377,62.265) -53.209,61.794 ccw(c-52.959,61.087) -53.672,61.319 cw(c-54.147,61.476) -53.721,61.214 v1(-54.15,60.785) -54.15,59.52 ccw(c-51.61,59.52) -53.406,57.724 v1(-50.673,54.991) -42.164,54.991 ccw(c-42.164,57.531) -39.624,57.531 v1(-39.624,58.801)
pads on no net: CON301. CON301.A8 CON301.B8 CON302.0 CON302.6 D301.1 D301.6 FID1.0 FID2.0 FID3.0 FID4.0 LED412.2 S201. S202. S203. S204. S205. S206. S207. S208. S209. S210. S211. S212. S213. S214. S215. S216. S217. S218. S219. S220. S221. S222. S223. S224. S225. S226. S227. S228. S229. S230. S231. S232. S233. S234. S235. S236. S237. S238. S239. S240. S241. S242. S243. S244. S245. S246. S247. S248. S249. S250. S251. S252. S253. S254. S255. S256. S257. S258. S259. S260. S261. S262. S263. S264. S265. S266. S267. S268. S269. S270.

## Polygon pours and split planes (outlines as drawn)
GND on Bottom Layer "Component Side-No Net" (hatched 45Degree grid 1.397 track 0.203, remove dead copper, pour order 0): -0.635,93.995 -0.635,0.65 -284.48,0.65 -284.48,93.995
GND on Component Side "Component Side-No Net" (hatched 45Degree grid 1.397 track 0.203, remove dead copper, pour order 2): -0.635,93.995 -0.635,0.65 -284.48,0.65 -284.48,93.995

## Other copper
Component Side:
  pour cut-out: -241.8,36.39 cw(c-241.8,37.79) -241.8,39.19 -43.18,39.19 cw(c-43.18,37.79) -41.78,37.79 cw(c-43.18,37.79) -43.18,36.39
  pour cut-out: -241.8,36.39 cw(c-241.8,37.79) -241.8,39.19 -43.18,39.19 cw(c-43.18,37.79) -41.78,37.79 cw(c-43.18,37.79) -43.18,36.39
  region net GND: 1746 vertices and 2 holes, not listed, extent -157.128,6.426 -151.216,12.565

## Silkscreen, mask and mechanical layers (free items; w line width, h text height)
Top Overlay:
  text "Steezy60-ALPS" at -255.27,61.595 h7
  text "by 4pplet" at -225.425,59.055 h1.52
  text "REV B2" at -254.762,59 h1.52
  text "BL/RESET" at -32.051,41.494 h0.75
Top Solder:
  drawing of 2 lines, arcs and shapes, not listed
outline:
  lines w0.1: -284.861,36.576 -280.67,36.576 ccw(c-280.67,37.719) -279.527,37.719 ; -284.85,36.565 -284.85,2.215 ccw(c-282.85,2.215) -282.85,0.215 -275.85,0.215 cw(c-272.7,-0.52) -269.55,0.215 -236.137,0.215 cw(c-232.987,-0.52) -229.838,0.215 -189.05,0.215 cw(c-185.9,-0.52) -182.75,0.215 -102.25,0.215 cw(c-99.1,-0.52) -95.95,0.215 -55.161,0.215 cw(c-52.011,-0.52) -48.861,0.215 -15.45,0.215 cw(c-12.3,-0.52) -9.15,0.215 -2.15,0.215 ccw(c-2.15,2.215) -0.15,2.215 ccw(c-0.15,2.238) -0.127,2.238 -0.127,36.576 -4.191,36.576 cw(c-4.191,37.846) -5.461,37.846 cw(c-4.242,37.846) -4.242,39.065 -0.15,39.065 -0.15,92.415 ccw(c-2.15,92.415) -2.15,94.415 -7.15,94.415 ; -279.527,37.795 ccw(c-280.797,37.795) -280.797,39.065 -284.85,39.065 -284.85,92.415 cw(c-282.85,92.415) -282.85,94.415 -275.85,94.415 ccw(c-272.7,95.149) -269.55,94.415 -250.424,94.415 ccw(c-247.274,95.149) -244.124,94.415 -189.05,94.415 ccw(c-185.9,95.149) -182.75,94.415 -131.361,94.415 ccw(c-128.211,95.149) -125.061,94.415 -102.25,94.415 ccw(c-99.1,95.149) -95.95,94.415 -40.874,94.415 ccw(c-37.724,95.149) -34.574,94.415 -13.477,94.415 ccw(c-10.327,95.149) -7.177,94.415
  lines w0.2: -279.527,37.719 -279.527,37.795
Mechanical 16:
  drawing of 529 lines, arcs and shapes, not listed

## Dimensions
-0.15,92.415 to -284.85,92.415 on top dimensions
-9.15,0.215 to -7.177,94.415 on top dimensions
-0.15,92.415 to -284.85,92.415 on bot dimensions
-9.15,0.215 to -2.15,94.415 on bot dimensions

## Text inside footprints (layer, text, board x,y; h text height)
CON301: Mechanical 15 "connector edge" at -15.25,95.25 h1 r180
S262: Mechanical 16 "7U" at -208.331,7.365 h1.52 r270; Mechanical 16 "6.25U" at -188.764,5.615 h1.52 r270; Mechanical 16 "6.25U" at -124.574,4.94 h1.52; Mechanical 16 "6U" at -131.824,11.515 h1.52; Mechanical 16 "7U" at -141.564,3.89 h1.52